# Altium PCB PCB1.PcbDoc
Units mil, origin at the board's own origin, x right, y up, seen from the top; angles counter-clockwise.
Board outline 3937.01 x 3937.01 mil, 2 copper layers (Top Layer, Bottom Layer); 162 components, 129 nets, 526 pads, 102 vias.
Unrouted connection lines stored in the file: 246.
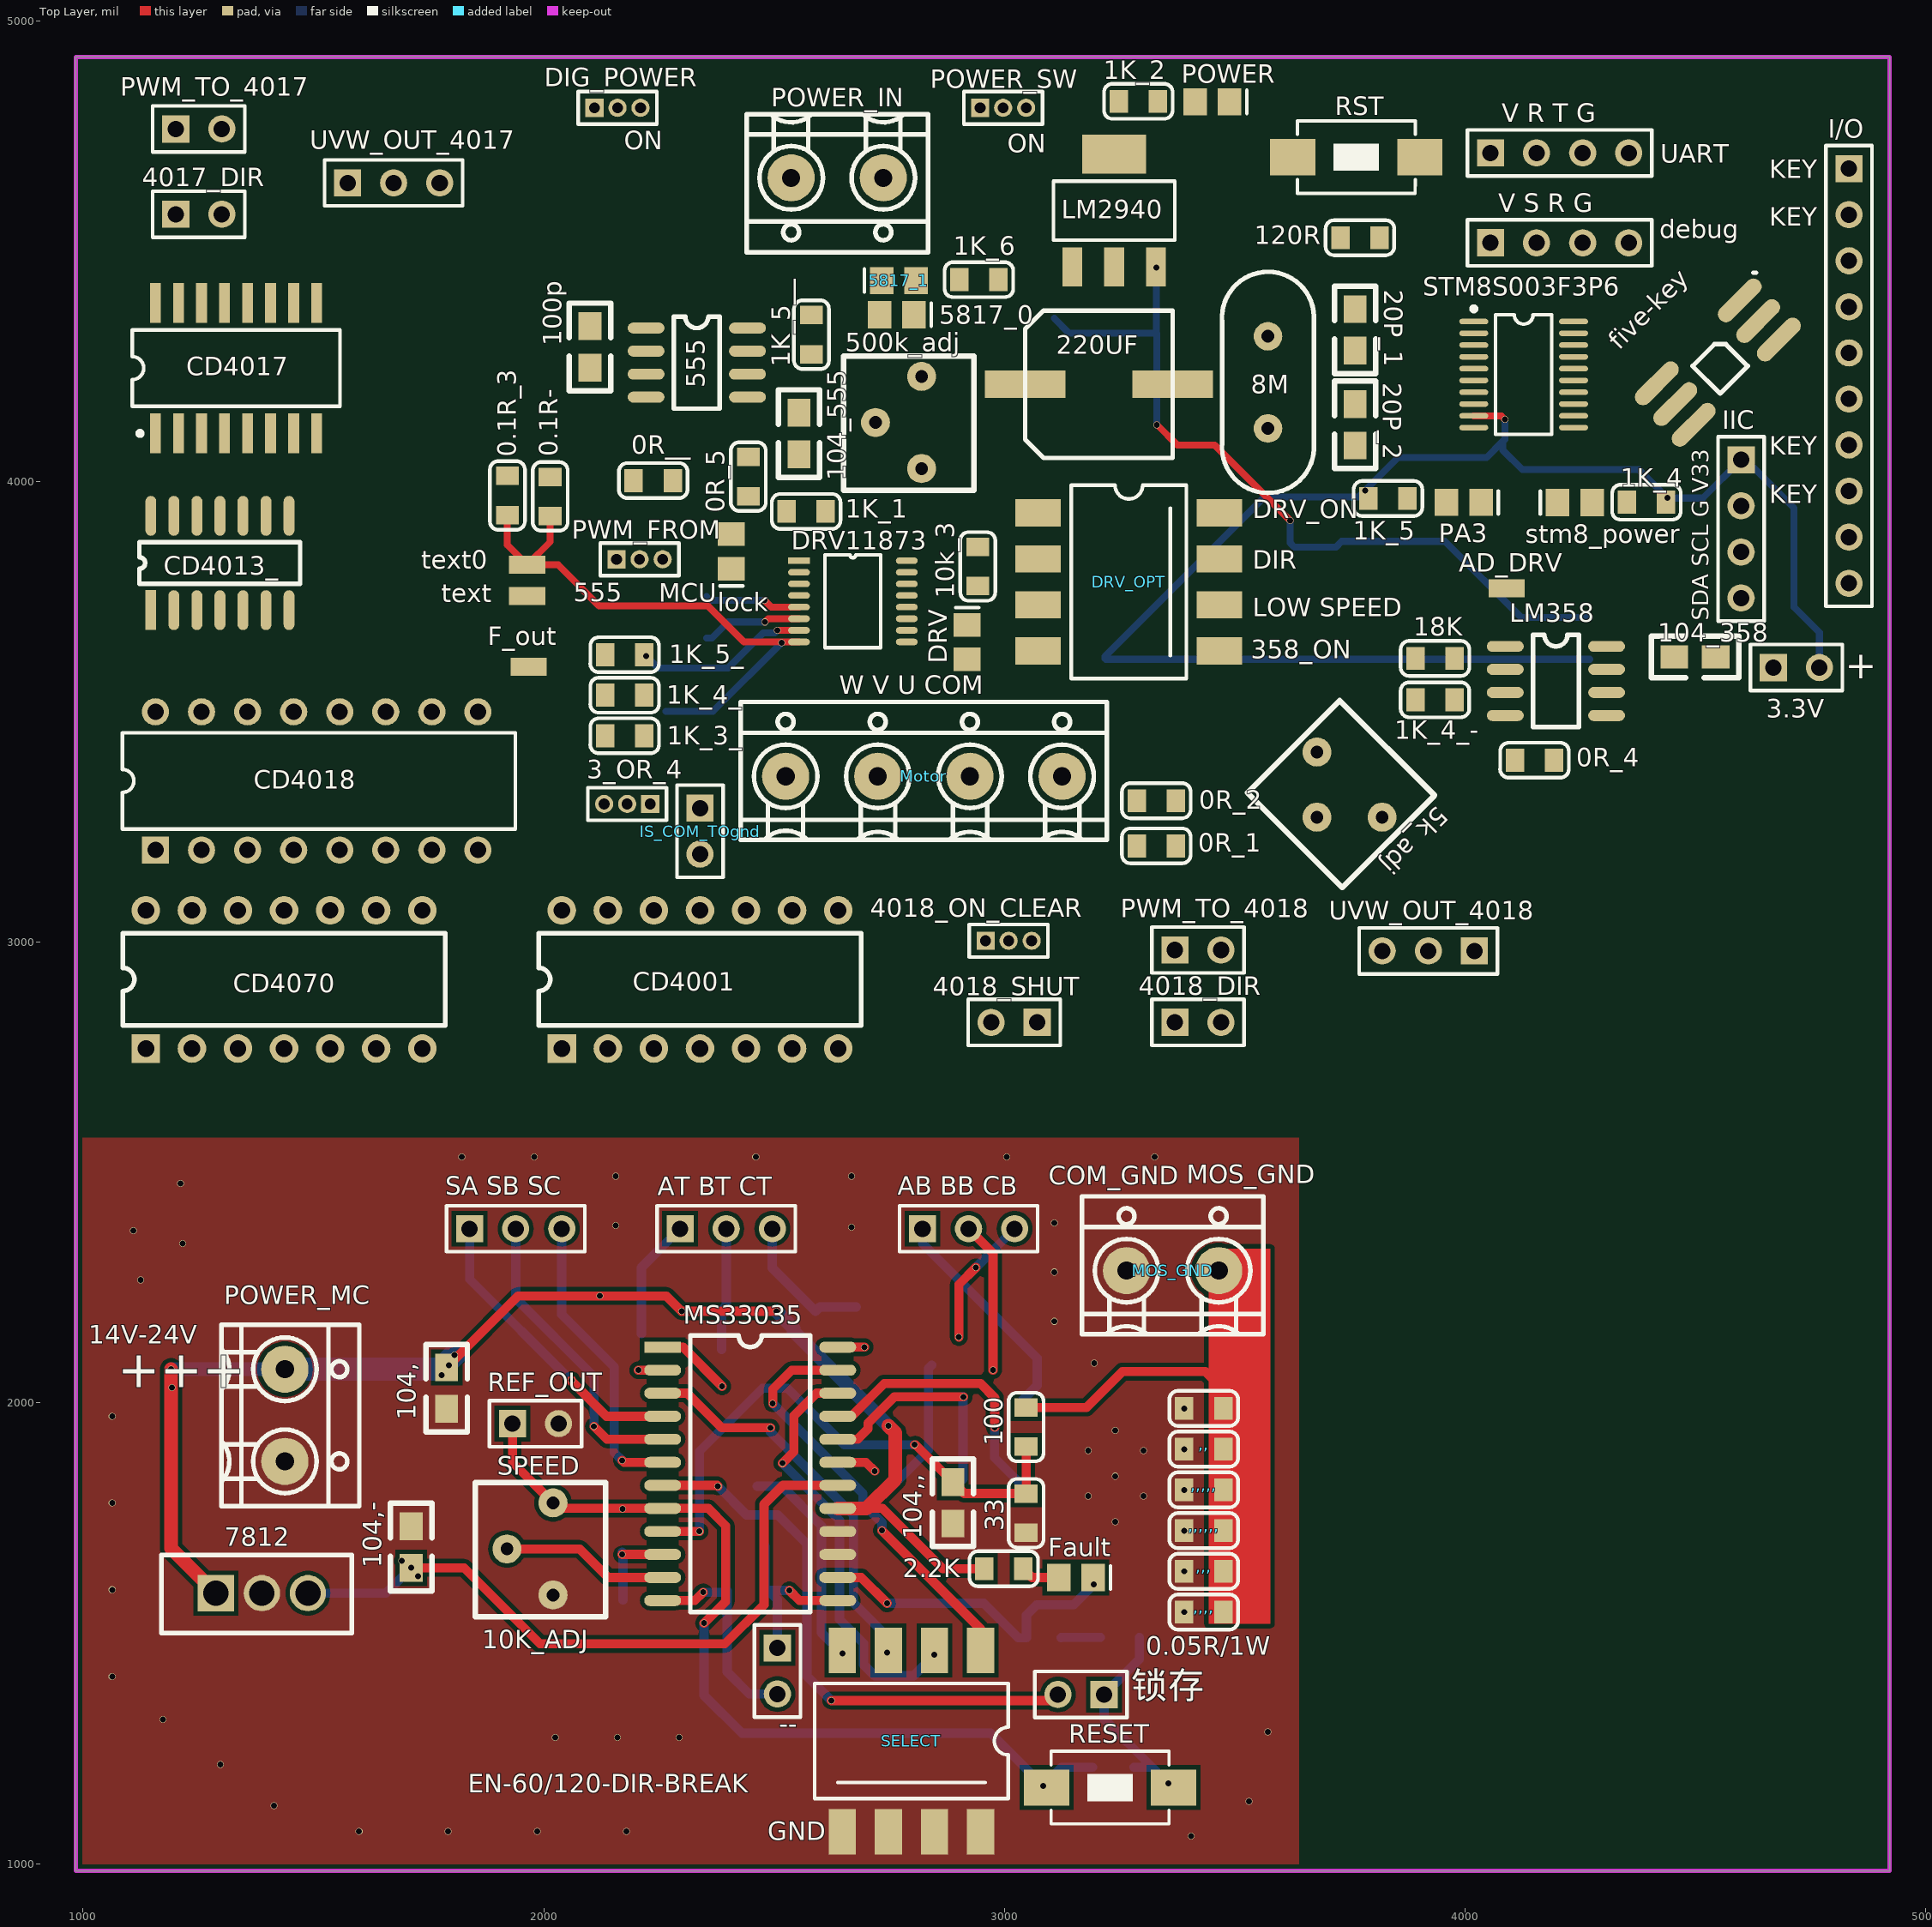
[diagram p0: Top Layer view]
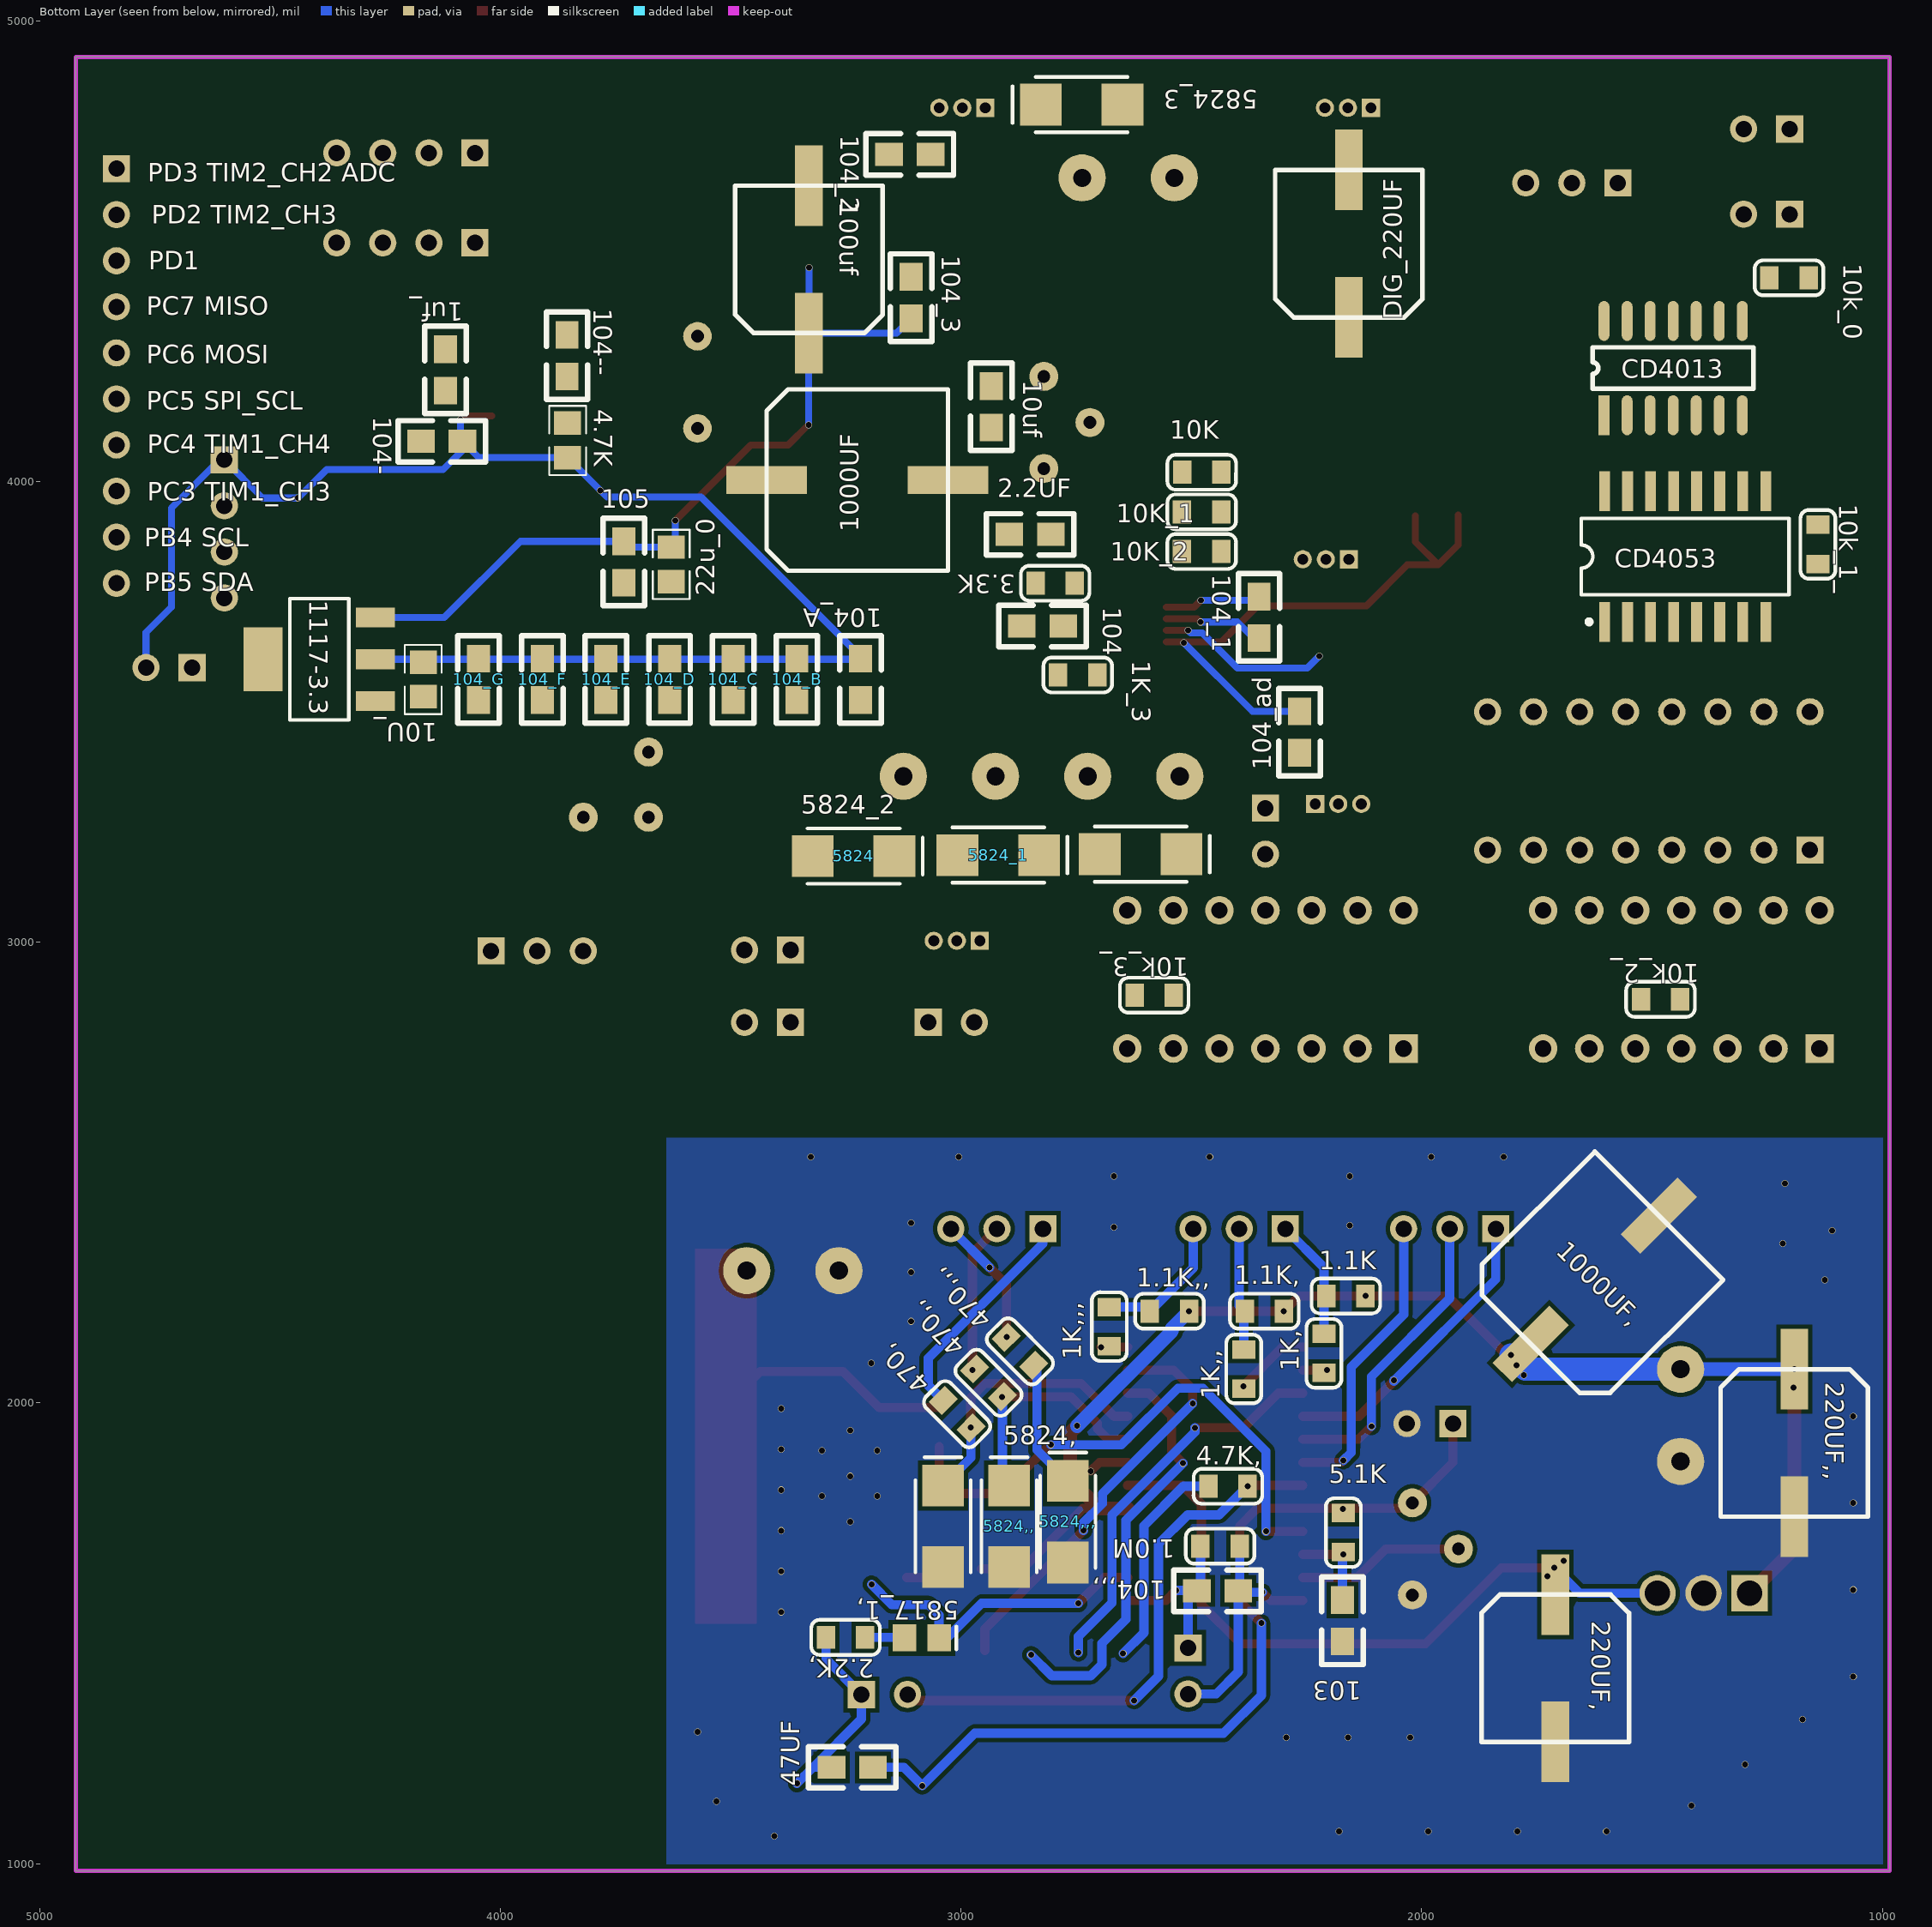
[diagram p1: Bottom Layer view, seen from below]

## Layer stack, top to bottom
Top Layer: signal copper 1.4
Dielectric: dielectric 12.6, FR-4, Dk 4.8
Bottom Layer: signal copper 1.4

## Board outline
984.25,984.25 4921.26,984.25 4921.26,4921.26 984.25,4921.26

## Design rules (kind name [scope] priority, off if disabled: settings)
Clearance [All] p1: gap=9
ComponentClearance [All] p1 off: gap=10 collisioncheckmode=3 verticalgap=10 showdistances=FALSE
PlaneConnect [All] p1: planeconnectstyle=Direct reliefexpansion=20 reliefentries=4 reliefconductorwidth=10 reliefairgap=10
PolygonConnect [All] p1: connectstyle=Direct reliefconductorwidth=10 reliefentries=4 polygonreliefangle="90 Angle"
RoutingVias [All] p1: holewidth=13 width=15 viastyle="Through Hole" minholewidth=13 minwidth=15 maxholewidth=13 maxwidth=15
SilkscreenOverComponentPads [All] p1: minsilkscreentomaskgap=10
SolderMaskExpansion [All] p1: expansion=4
Width Width_1 [All] p1: maxlimit=50 minlimit=8 preferedwidth=13
25 further rules are at their usual default settings.

## Components (designator, comment, footprint, x,y, rotation, side; value= is the part's Value field where it differs from the comment)
0.1R- "Res2" "RES 0805_1" 2014,4010 r270 top
0.1R_3 "Res2" "RES 0805_1" 1921,4012 r270 top
0.05R/1W "Res2" "RES 0805_1" 3475,1988 r180 top
0R_1 "Res2" "RES 0805_1" 3372,3209 r180 top
0R_2 "Res2" "RES 0805_1" 3372,3307 r180 top
0R_4 "Res2" "RES 0805_1" 4108,3395 r0 top
0R_5 "Res2" "RES 0805_1" 2444,4053 r270 top
0R__ "Res2" "RES 0805_1" 2195,4002 r0 top
1.0M "Res2" "RES 0805_1" 2395,1689 r0 bottom
1.1K "Res2" "RES 0805_1" 2122,2232 r0 bottom
1.1K, "Res2" "RES 0805_1" 2299,2199 r0 bottom
1.1K,, "Res2" "RES 0805_1" 2505,2199 r0 bottom
1K, "Res2" "RES 0805_1" 2212,2150 r270 bottom
1K,, "Res2" "RES 0805_1" 2386,2116 r270 bottom
1K,,, "Res2" "RES 0805_1" 2678,2208 r270 bottom
1K_1 "Res2" "RES 0805_1" 2527,3935 r0 top
1K_2 "Res2" "RES 0805_1" 3333,4825 r180 top
1K_3 "Res2" "RES 0805_1" 2789,3580 r180 bottom
1K_3_ "Res2" "RES 0805_1" 2133,3448 r0 top
1K_4 "Res2" "RES 0805_1" 4351,3955 r0 top
1K_4_ "Res2" "RES 0805_1" 2133,3536 r0 top
1K_4_- "Res2" "RES 0805_1" 3976.9,3526 r180 top
1K_5 "Res2" "RES 0805_1" 3875,3963 r180 top
1K_5_ "Res2" "RES 0805_1" 2133,3624 r0 top
1K_5__ "Res2" "RES 0805_1" 2581,4276 r90 top
1K_6 "Res2" "RES 0805_1" 2902,4438 r0 top
1uf_ "1UF" 0805 4119,4197 r90 bottom
2.2K "Res2" "RES 0805_1" 2956,1640 r0 top
2.2K, "Res2" "RES 0805_1" 3208,1491 r0 bottom
2.2UF "Cap" 0805_C 2805,3885 r0 bottom
3.3K "Res2" "RES 0805_1" 2753,3779 r0 bottom
3.3V "PIN 2" HDR1X2 4669,3596 r0 top
3_OR_4 "MHDR1X3" MHDR1X3 2231,3300 r180 top
4.7K "4.7K" 0805-1 3854,4089 r270 bottom
4.7K, "Res2" "RES 0805_1" 2463,1819 r180 bottom
5.1K "Res2" "RES 0805_1" 2170,1676 r90 bottom
5k_adj "Header 3" pot（正方形） 3761,3436 r225 top
8M "8M" XTAL2 3572,4115 r270 top
10K "Res2" "RES 0805_1" 2519.9,4020 r180 bottom
10k_0 "Res2" "RES 0805_1" 1245,4442 r180 bottom
10K_1 "Res2" "RES 0805_1" 2435,3934 r0 bottom
10k_1_ "Res2" "RES 0805_1" 1140,3821 r90 bottom
10K_2 "Res2" "RES 0805_1" 2435,3848 r0 bottom
10k_2_ "Res2" "RES 0805_1" 1524,2876 r180 bottom
10k_3 "Res2" "RES 0805_1" 2942,3858 r270 top
10k_3_ "Res2" "RES 0805_1" 2623,2885 r180 bottom
10U_ "Cap Pol1" 0805-1 4167,3570 r270 bottom
10uf "Cap" 0805_C 2934,4117 r90 bottom
18K "Res2" "RES 0805_1" 3892,3616 r0 top
20P_1 "20P" 0805 3761,4374 r270 top
20P_2 "20P" 0805 3761,4078 r90 top
22u_0 "Cap Pol1" 0805-1 3629,3820 r270 bottom
33 "Res2" "RES 0805_1" 3047,1718.11 r90 top
47UF "Cap" 0805_C 3191,1209 r0 bottom
100 "Res2" "RES 0805_1" 3047,1990 r270 top
100p "Cap" 0805_C 2100,4337 r270 top
100uf "Cap Pol1" capso_8*10 3330,4482 r270 bottom
103 "Cap" 0805_C 2172,1572 r270 bottom
104 "Cap" 0805_C 2868,3686 r180 bottom
104, "Cap" 0805_C 1789,1987 r90 top
104,, "Cap" 0805_C 2888,1828 r270 top
104,,, "Cap" 0805_C 2488,1592 r180 bottom
104,- "Cap" 0805_C 1712,1732 r270 top
104- "104" 0805 4082,4087 r0 bottom
104-- "104" 0805 3855,4318 r270 bottom
104_1 "Cap" 0805_C 2353,3660 r90 bottom
104_2 "Cap" 0805 3156,4710 r180 bottom
104_3 "Cap" 0805 3108,4444 r270 bottom
104_358 "Cap" 0805_C 4544,3619 r180 top
104_555 "Cap" 0805_C 2554,4059 r90 top
104_A "104" 0805 3218,3615.53 r270 bottom
104_ad "Cap" 0805_C 2265,3411 r90 bottom
104_B "104" 0805 3356.17,3615.53 r270 bottom
104_C "104" 0805 3494.33,3615.53 r270 bottom
104_D "104" 0805 3632.5,3615.53 r270 bottom
104_E "104" 0805 3770.67,3615.53 r270 bottom
104_F "104" 0805 3908.83,3615.53 r270 bottom
104_G "104" 0805 4047,3615.53 r270 bottom
105 "105" 0805 3732,3870 r270 bottom
120R "Res2" "RES 0805_1" 3814,4529 r180 top
220UF "Cap Pol1" capso_8*10 3205,4211 r180 top
220UF, "Cap Pol1" capso_8*10 1710,1424 r90 bottom
220UF,, "Cap Pol1" capso_8*10 1191,1913 r90 bottom
470, "Res2" "RES 0805_1" 3038.41,2005.48 r225 bottom
470,, "Res2" "RES 0805_1" 2970.17,2073.71 r225 bottom
470,,, "Res2" "RES 0805_1" 2901.93,2141.95 r225 bottom
500k_adj "Header 3" pot（正方形） 2895,4186 r180 top
555 "Header 4X2A" SOP8 2337,4258 r0 top
1000UF "Cap Pol1" CAPSO_10*10 3225,4003 r0 bottom
1000UF, "Cap Pol1" CAPSO_10*10 1624,2267 r315 bottom
1117-3.3 "LM1117" SOT223 4390,3634 r90 bottom
4017_DIR "Header 2" HDR1X2 1201,4580 r0 top
4018_DIR "Header 2" HDR1X2 3370,2826 r0 top
4018_ON_CLEAR "MHDR1X3" MHDR1X3 2959,3003 r0 top
4018_SHUT "Header 2" HDR1X2 3071,2826 r180 top
5817_0 "1N5819" LED_0805 2766,4362 r0 top
5817_1 "1N5819" LED_0805 2771,4436 r180 top
5817_1, "1N5819" LED_0805 3085,1490 r180 bottom
5824 "1N5819" DIODE-SMA 3233,3187 r180 bottom
5824, "1N5819" DIODE-SMA 3039,1732 r90 bottom
5824,, "1N5819" DIODE-SMA 2895.5,1732 r90 bottom
5824,,, "1N5819" DIODE-SMA 2768,1742 r90 bottom
5824_1 "1N5819" DIODE-SMA 2919,3189 r180 bottom
5824_2 "1N5819" DIODE-SMA 2610,3191 r180 bottom
5824_3 "1N5819" DIODE-SMA 2738,4818 r0 bottom
7812 "L78XXCV" TO-220B 1288,1587 r0 top
,, "Res2" "RES 0805_1" 3475,1899.6 r180 top
,,, "Res2" "RES 0805_1" 3475,1634.4 r180 top
,,,, "Res2" "RES 0805_1" 3475,1546 r180 top
,,,,, "Res2" "RES 0805_1" 3475,1811.2 r180 top
,,,,,, "Res2" "RES 0805_1" 3475,1722.8 r180 top
-- "Header 2" HDR1X2 2507,1468 r270 top
"AB BB CB" "Header 3" HDR1X3 2822,2378 r0 top
AD_DRV "1PIN" P 4090,3768 r180 top
"AT BT CT" "Header 3" HDR1X3 2296,2378 r0 top
CD4001 "Header 7X2A" DIP14 2039,2769 r90 top
CD4013 "Header 7X2A" SOP-14P 1454,4246 r90 bottom
CD4013_ "Header 7X2A" SOP-14P 1297,3823 r90 top
CD4017 "Header 8X2A" sop16(2003) 1332,4246 r0 top
CD4018 "Header 8X2A" DIP16 1507,3350 r0 top
CD4053 "Header 8X2A" sop16(2003) 1428,3837 r180 bottom
CD4070 "Header 7X2A" DIP14 1136.17,2769 r90 top
debug "Header 4" HDR1X4 4055,4518 r0 top
DIG_220UF "Cap Pol1" capso_8*10 2158,4516 r270 bottom
DIG_POWER "MHDR1X3" MHDR1X3 2110,4811 r0 top
DRV "LED" LED_0805 2919,3651 r90 top
DRV11873 "Header 8X2A" TSSOP16 2554,3828 r0 top
DRV_OPT "SW DIP-4" SW8_4BIT 3270,3782 r270 top
F_out "1PIN" P 1967,3598 r180 top
Fault "LED" LED_0805 3155,1621 r0 top
five-key "five_key" 五向按键 4416,4213 r0 top
I/O "Header 10" HDR1X10 4833,4679 r270 top
IIC "Header 4" HDR1X4 4599,4047 r270 top
IS_COM_TOgnd "Header 2" HDR1X2 2339,3291 r270 top
LM358 "10358" SOP8 4202,3567 r0 top
LM2940 "LM2940_2" SOT223 3258,4585 r0 top
lock "LED" LED_0805 2407,3848 r270 top
MOS_GND "Header 2" ED120/2DS_1 3465,2287 r180 top
Motor "Header 4" ED120/4DS_1 3125,3360 r180 top
MS33035 "Header 12X2A" SO-24W 2259,2121 r0 top
PA3 "LED" LED_0805 3997,3954.53 r0 top
POWER "LED" LED_0805 3451,4824 r0 top
POWER_IN "Header 2" ED120/2DS_1 2537,4659 r0 top
POWER_MC "Header 2" ED120/2DS_1 1438,1873 r90 top
POWER_SW "MHDR1X3" MHDR1X3 2947,4811 r0 top
PWM_FROM "MHDR1X3" MHDR1X3 2158,3831 r0 top
PWM_TO_4017 "Header 2" HDR1X2 1201,4765 r0 top
PWM_TO_4018 "Header 2" HDR1X2 3370,2983 r0 top
REF_OUT "Header 2" HDR1X2 1932,1955 r0 top
RESET "SW-PB" SW_PB2_A1 3227,1165 r270 top
RST "SW-PB" SW_PB2_A1 3766,4704 r90 top
"SA SB SC" "Header 3" HDR1X3 1839,2378 r0 top
SELECT "SW DIP-4" SW8_4BIT 2798,1266 r180 top
SPEED "MHDR1X3" pot（正方形） 2095,1741 r180 top
stm8_power "LED" LED_0805 4238,3954 r180 top
STM8S003F3P6 "STM8S003F3P6" TSSOP20 4127,4232 r270 top
text "1PIN" P 1964,3751 r180 top
text0 "1PIN" P 1964,3819 r180 top
UART "PIN 4" HDR1X4 4055,4713 r0 top
UVW_OUT_4017 "Header 3" HDR1X3 1574,4648 r0 top
UVW_OUT_4018 "Header 3" HDR1X3 4020,2981 r180 top
锁存 "Header 2" HDR1X2 3216,1367 r180 top

## Footprints (in the part's own frame and the unit in brackets; to place one, negate y for a bottom-side part, rotate by r counter-clockwise, add the part's x,y. Pads: shape width x height; smd on the part's side, far side on the other; paste and mask are expansions set on the pad)
0805 [mil]
  rect 60x50 smd: 1(0,0) 2(90,0)
  silkscreen extent -50,-45 140,45
0805-1 [mm] "ÌùÆ"
  rect 1.3x1.5 smd: 1(-0.95,0) 2(0.95,0)
  silkscreen extent -1.91,-1.02 1.9,1.02, body extent -1.14,-0.51 1.14,0.51, height 1
0805_C [mil]
  rect 60x50 smd: 1(0,0) 2(90,0)
  silkscreen extent -50,-45 140,45, body extent 6,-25 84,25, height 31
capso_8*10 [mil]
  rect 175x60 smd: 1(160,0) 2(-160,0)
  silkscreen extent -160,-160 160,160, body extent -192,-162 198,164, height 402
CAPSO_10*10 [mil]
  rect 175x60 smd: 1(196.85,0) 2(-196.85,0)
  silkscreen extent -197,-197 197,197, body extent -227,-206 229,200, height 402
DIODE-SMA [mm] "贴?"
  rect 2.3x2.3 smd: 1(-2.25,0) 2(2.25,0)
  silkscreen extent -2.54,-1.52 3.81,1.52, body extent -2.92,-1.4 2.92,1.4, height 3
DIP14 [mil]
  rect 62x62 hole 36: 1(0,0)
  round 62 hole 36: 2(0,-100) 3(0,-200) 4(0,-300) 5(0,-400) 6(0,-500) 7(0,-600) 8(300,-600) 9(300,-500) 10(300,-400) 11(300,-300) 12(300,-200) 13(300,-100) 14(300,0)
  silkscreen extent 50,-650 250,50
DIP16 [mm]
  rect 1.5x1.5 hole 0.9: 1(-8.89,-3.81)
  round 1.5 hole 0.9: 2(-6.35,-3.81) 3(-3.81,-3.81) 4(-1.27,-3.81) 5(1.27,-3.81) 6(3.81,-3.81) 7(6.35,-3.81) 8(8.89,-3.81) 9(8.89,3.81) 10(6.35,3.81) 11(3.81,3.81) 12(1.27,3.81) 13(-1.27,3.81) 14(-3.81,3.81) 15(-6.35,3.81) 16(-8.89,3.81)
  silkscreen extent -10.72,-2.65 10.95,2.65
ED120/2DS_1 [mm]
  round 2.6 hole 1: 1(0,0) 2(5.08,0)
  silkscreen extent -2.46,-4.1 7.54,3.5
ED120/4DS_1 [mm]
  round 2.6 hole 1: 1(0,0) 2(5.08,0) 3(10.16,0) 4(15.24,0)
  silkscreen extent -2.46,-4.1 17.72,3.5
HDR1X2 [mm] "Connector; Header; 2 Position"
  rect 1.5x1.5 hole 0.9: 1(0,0)
  round 1.5 hole 0.9: 2(2.54,0)
  silkscreen extent -1.27,-1.27 3.81,1.27
HDR1X3 [mm] "Connector; Header; 3 Position"
  rect 1.5x1.5 hole 0.9: 1(0,0)
  round 1.5 hole 0.9: 2(2.54,0) 3(5.08,0)
  silkscreen extent -1.27,-1.27 6.35,1.27
HDR1X4 [mm] "Connector; Header; 4 Position"
  rect 1.5x1.5 hole 0.9: 1(0,0)
  round 1.5 hole 0.9: 2(2.54,0) 3(5.08,0) 4(7.62,0)
  silkscreen extent -1.27,-1.27 8.89,1.27
HDR1X10 [mm] "Connector; Header; 10 Position"
  rect 1.5x1.5 hole 0.9: 1(0,0)
  round 1.5 hole 0.9: 2(2.54,0) 3(5.08,0) 4(7.62,0) 5(10.16,0) 6(12.7,0) 7(15.24,0) 8(17.78,0) 9(20.32,0) 10(22.86,0)
  silkscreen extent -1.27,-1.27 24.13,1.27
LED_0805 [mm] "贴?"
  rect 1.3x1.5 smd: 1(-0.95,0) 2(0.95,0)
  silkscreen extent 1.91,-0.64 1.91,0.64
MHDR1X3 [mm] "Connector; Header; 3 Position"
  rect 1x1 hole 0.6: 1(0,0)
  round 1 hole 0.6: 2(1.27,0) 3(2.54,0)
  silkscreen extent -0.9,-0.9 3.44,0.9
P [mm]
  rect 2x1 smd: 1(0,0)
pot（正方形） [mm]
  round 1.6 hole 0.7: 1(1.905,-1.067) 2(4.445,1.473) 3(1.905,4.013)
  silkscreen extent -0.99,-2.18 6.2,5.21
"RES 0805_1" [mil]
  rect 40x50 smd: 1(0,0) 2(85,0)
  silkscreen extent -32,-38 117,38, body extent 3,-25 82,25, height 30
SO-24W [mil]
  rect 80x24 smd: 1(-1,0)
  oval 80x24 smd: 2(-1,-50) 3(-1,-100) 4(-1,-150) 5(-1,-200) 6(-1,-250) 7(-1,-300) 8(-1,-350) 9(-1,-400) 10(-1,-450) 11(-1,-500) 12(-1,-550) 13(379,-550) 14(379,-500) 15(379,-450) 16(379,-400) 17(379,-350) 18(379,-300) 19(379,-250) 20(379,-200) 21(379,-150) 22(379,-100) 23(379,-50) 24(379,0)
  silkscreen extent 59,-575 319,25
SOP8 [mil]
  oval 80x24 smd: 1(-115,75) 2(-115,25) 3(-115,-25) 4(-115,-75) 5(105,-75) 6(105,-25) 7(105,25) 8(105,75)
  silkscreen extent -55,-100 45,100, body extent -126,-95 110,97, height 67
sop16(2003) [mm] "Small Outline; 16 Leads; Body Width 5.6 mm; Pitch"
  rect 0.6x2.2 smd: 1(-4.445,-3.6) 2(-3.175,-3.6) 3(-1.905,-3.6) 4(-0.635,-3.6) 5(0.635,-3.6) 6(1.905,-3.6) 7(3.175,-3.6) 8(4.445,-3.6) 9(4.445,3.6) 10(3.175,3.6) 11(1.905,3.6) 12(0.635,3.6) 13(-0.635,3.6) 14(-1.905,3.6) 15(-3.175,3.6) 16(-4.445,3.6)
  silkscreen extent -5.73,-3.72 5.73,2.1
SOP-14P [mm]
  rect 2.2x0.6 smd: 1(-2.6,3.81)
  oval 2.2x0.6 smd: 2(-2.6,2.54) 3(-2.6,1.27) 4(-2.6,0) 5(-2.6,-1.27) 6(-2.6,-2.54) 7(-2.6,-3.81) 8(2.6,-3.81) 9(2.6,-2.54) 10(2.6,-1.27) 11(2.6,0) 12(2.6,1.27) 13(2.6,2.54) 14(2.6,3.81)
  silkscreen extent -1.14,-4.42 1.14,4.44
SOT223 [mm]
  rect 1.1x2.15 smd: 1(-2.808,-3.025) 2(-0.508,-3.025) 3(1.792,-3.025)
  rect 3.5x2.15 smd: 4(-0.508,3.175)
  silkscreen extent -3.86,-1.55 2.84,1.7, body extent -3.78,-3.2 2.72,3.8, height 1.65
SW8_4BIT [mm]
  rect 1.5x2.5 smd: 1(-3.81,-5) 2(-1.27,-5) 3(1.27,-5) 4(3.81,-5) 5(3.81,5) 6(1.27,5) 7(-1.27,5) 8(-3.81,5)
  silkscreen extent -5.33,-3.18 5.33,3.18, body extent -5.21,-3.43 5.08,3.43, height 2.15
SW_PB2_A1 [mm]
  rect 2x2.5 smd: 1(0,3.556) 2(0,-3.444)
  silkscreen extent -2,-3.19 2,3.31, body extent -2.03,-3.17 2.03,3.3, height 1.2
TO-220B [mm]
  rect 2x2 hole 1.4: 1(0,0)
  round 2 hole 1.4: 2(2.54,0) 3(5.08,0)
  silkscreen extent -3,-2.2 7.5,2.1
TSSOP16 [mm]
  rect 1.2x0.36 smd: 1(0,0)
  oval 1.2x0.36 smd: 2(0,-0.64) 3(0,-1.28) 4(0,-1.92) 5(0,-2.56) 6(0,-3.2) 7(0,-3.84) 8(0,-4.48) 9(5.94,-4.48) 10(5.94,-3.84) 11(5.94,-3.2) 12(5.94,-2.56) 13(5.94,-1.92) 14(5.94,-1.28) 15(5.94,-0.64) 16(5.94,0)
  silkscreen extent 1.43,-4.8 4.5,0.32
TSSOP20 [mm] "Shrink Small Outline; 20 Leads; Body Width 4.4 mm; Pitch 0.65 mm"
  oval 0.3x1.6 smd: 1(-2.925,-2.75) 2(-2.275,-2.75) 3(-1.625,-2.75) 4(-0.975,-2.75) 5(-0.325,-2.75) 6(0.325,-2.75) 7(0.975,-2.75) 8(1.625,-2.75) 9(2.275,-2.75) 10(2.925,-2.75) 11(2.925,2.75) 12(2.275,2.75) 13(1.625,2.75) 14(0.975,2.75) 15(0.325,2.75) 16(-0.325,2.75) 17(-0.975,2.75) 18(-1.625,2.75) 19(-2.275,2.75) 20(-2.925,2.75)
  silkscreen extent -3.75,-2.87 3.3,1.55, body extent -3.3,-1.91 3.3,1.91, height 1.1
XTAL2 [mil]
  round 62 hole 28: 1(0,0) 2(-200,0)
  silkscreen extent -340,-100 140,100
五向按键 [mil]
  oval 35.43x120 smd rot 135: 1(0,0) 2(40,-45) 3(80,-90) 4(180,180) 5(220,135) 6(265,95)
  silkscreen extent 78,-22 215,240

## Part data
0.1R- 0.1R_3 0.05R/1W 0R_1 0R_2 0R_4 0R_5 0R__ 1.0M 1.1K 1.1K, 1.1K,, 1K, 1K,, 1K,,, 1K_1 1K_2 1K_3 1K_3_ 1K_4 1K_4_ 1K_4_- 1K_5 1K_5_ 1K_5__ 1K_6 2.2K 2.2K, 3.3K 4.7K, 5.1K 10K 10k_0 10K_1 10k_1_ 10K_2 10k_2_ 10k_3 10k_3_ 18K 33 100 120R 470, 470,, 470,,, ,, ,,, ,,,, ,,,,, ,,,,,,: "Resi"
1uf_ 20P_1 20P_2 104- 104--: library part "CAP 2"
2.2UF 10uf 47UF 100p 103 104 104, 104,, 104,,, 104,- 104_1 104_358 104_555 104_ad: "Capac"
3_OR_4 4018_ON_CLEAR "AB BB CB" "AT BT CT" DIG_POWER POWER_SW PWM_FROM "SA SB SC" UVW_OUT_4017 UVW_OUT_4018: "Header, 3-Pin"
4.7K: library part R
5k_adj 500k_adj SPEED: "Header"
8M: library part XTAL
10U_ 22u_0 100uf 220UF 220UF, 220UF,, 1000UF 1000UF, DIG_220UF: "Polarized Capacitor (Radial)"
104_2 104_3: "Capacitor"
104_A 104_B 104_C 104_D 104_E 104_F 104_G 105: library part Cap, "Capacitor"
555: "Header, 4-Pin, Dual row"
1117-3.3: library part Component_1
4017_DIR 4018_DIR 4018_SHUT -- IS_COM_TOgnd PWM_TO_4017 PWM_TO_4018 REF_OUT 锁存: "Header, 2-Pin"
5817_0 5817_1 5817_1, 5824 5824, 5824,, 5824,,, 5824_1 5824_2 5824_3: library part "Diode 1N4001", "1 Amp General Purpose Rectifier"
7812: "ST POSITIVE VOLTAGE REGULAT"
CD4001 CD4070: "Header, 7-Pin, Dual row"
CD4013 CD4013_: "Header, 7-Pin, Dual r"
CD4017 CD4018 CD4053 DRV11873: "Header, 8-Pin, Dual row"
debug IIC: "Header, 4-Pin"
DRV lock PA3 POWER stm8_power: library part L
DRV_OPT SELECT: "±àÂë¿"
five-key: library part five_
I/O: "Header, 10-Pin"
LM358: library part 103
LM2940: library part LM29
MOS_GND POWER_IN POWER_MC: "Header, 2-"
Motor: "Header, 4-"
MS33035: "Header, 12-Pin, Dual row"
RESET RST: "Î¢¶¯¿"

## Via types
v1: diameter 15, hole 13, Top Layer to Bottom Layer, 102 vias

## Nets (pads, with @x,y where several pads share a name; then routed paths per layer and width w, separated by ;. In a path a pad name is that pad's centre, name@x,y a point inside that pad or via, vN(x,y) a via of type N, cw(c..) or ccw(c..) an arc to the next point about the centre after c; other vN are vias at no path point)
00: CD4013.6 CD4017.3
11: CD4013_.4 CD4017.2
22: CD4013.8 CD4017.4
33: CD4013.4 CD4017.7
44: CD4013_.6 CD4017.10
55: CD4013.10 CD4017.1
60/120: MS33035.22 SELECT.2 | length 921.1
  Top Layer w20: v1(2518,1869) 2543,1894 2543,1972 2592,2021 MS33035.22
  Bottom Layer w20: v1(2518,1869) 2642,1745 2642,1530 2694,1478 2694,1432 2718,1408 2803,1408 v1(2848,1453)
66: CD4017.5 CD4017.15
77: CD4017.6
88: CD4017.9
99: CD4017.11
358_VCC: 104_358.2 DRV_OPT.5 LM358.8
555_OUT: 555.3 PWM_FROM.1 PWM_TO_4017.2 PWM_TO_4018.2
+3V3: 1K_4.2 1K_5.2 3.3V.2 4.7K.2 10U_.1 104-.1 104_A.1 104_B.1 104_C.1 104_D.1 104_E.1 104_F.1 104_G.1 1117-3.3.2 debug.1 IIC.1 STM8S003F3P6.9 UART.1 | length 3374
  Top Layer w15: STM8S003F3P6.9 4078.57,4142.43 v1(4086,4135)
  Bottom Layer w15: 104_A.1 3218,3620 3564,3966 3768.4,3966 4.7K.2 4046.6,4051.6 104-.1 ; 104_A.1@3219.53,3614 1117-3.3.2 ; v1(4086,4135) 4086,4091 104-.1 ; 3.3V.2 4769,3672 4714,3727 4714,3942 4609,4047 IIC.1 4516,3964 v1(4439,3964) 4377,4026 4124,4026 4082,4068 104-.1
  other v1: 3783,3980.6
A: 10k_1_.1 4017_DIR.1 CD4053.9 CD4053.10 CD4053.11
AB: 470,.1 "AB BB CB.1" | length 489.2
  Bottom Layer w20: 2822,2378 2822,2346 3071,2097 3071,2038.07 3038.41,2005.48
AD-DRV: 5k_adj.2 5k_adj.3 AD_DRV.1 LM358.1
AT: 1.1K.2 1K,.1 "AT BT CT.1" | length 262.8
  Bottom Layer w20: 2212,2150 2212,2294 2296,2378
BB: 470,,.1 "AB BB CB.2" | length 329
  Top Layer w20: 2922,2378 2975,2325 v1(2975,2071)
BREAK: MS33035.23 SELECT.1 | length 911.9
  Top Layer w20: v1(2497,1999) 2497,2030 2538,2071 MS33035.23 ; v1(2734,1723) 2948,1509 SELECT.1
  Bottom Layer w20: v1(2497,1999) 2692.51,1803.49 2692.51,1781.49 2734,1740 v1(2734,1723)
BT: 1.1K,.2 1K,,.1 "AT BT CT.2" | length 267.8
  Bottom Layer w20: 2386,2116 2386,2197 2384,2199 2396,2211 2396,2378
CB: 470,,,.1 "AB BB CB.3" | length 285.1
  Top Layer w20: v1(2901,2143) 2901,2257 v1(2938,2294)
  Bottom Layer w20: v1(2938,2294) 3022,2378
CLOCK: CD4017.14 PWM_TO_4017.1
COM: 3_OR_4.2 DRV11873.13 Motor.1
COM_TO: 1K_3_.1 1K_4_.1 1K_5_.1 3_OR_4.3
CP: CD4018.14 PWM_TO_4018.1
CPN: 104_1.1 DRV11873.6 | length 218.4
  Top Layer w15: v1(2480,3695) 2487.02,3702.02 DRV11873.6
  Bottom Layer w15: 104_1.1 2365,3660 2400,3695 v1(2480,3695)
CPP: 104_1.2 DRV11873.5 | length 210.4
  Top Layer w15: v1(2479,3742) 2493.79,3727.21 DRV11873.5
  Bottom Layer w15: 104_1.2 2361,3742 v1(2479,3742)
CS: 3.3K.2 DRV11873.14
CT: 1.1K,,.2 1K,,,.1 "AT BT CT.3" | length 309.7
  Bottom Layer w20: 2496,2378 2496,2293 2590,2199 2599,2208 2678,2208
"CUR SEN": 33.2 100.2 104,,.1 MS33035.9 | length 1216.5
  Top Layer w20: MS33035.9 v1(2338,1721) ; v1(2805,1909) 2807,1909 2888,1828 2912.89,1803.11 33.2 100.2
  Bottom Layer w20: v1(2338,1721) 2338,1895 2475,2032 2529,2032 2652,1909 v1(2805,1909)
DIG_VCC: 10k_0.2 10k_1_.2 10k_2_.2 10k_3_.1 4018_ON_CLEAR.3 CD4001.14 CD4013.5 CD4013.9 CD4013.14 CD4013_.5 CD4013_.14 CD4017.16 CD4018.16 CD4053.16 CD4070.14 DIG_220UF.2 DIG_POWER.2
DIR: MS33035.3 SELECT.3 | length 857.9
  Top Layer w20: MS33035.3 2311,2021 2386,1946 v1(2492,1946)
  Bottom Layer w20: v1(2492,1946) 2492,1937 2672,1757 2672,1566 2745,1493 v1(2745,1458)
EN: 4.7K,.2 MS33035.7 锁存.2 | length 1224.9
  Top Layer w20: MS33035.7 2376,1821 v1(2378,1819) ; v1(2624,1354) 3103,1354 锁存.2
  Bottom Layer w20: v1(2378,1819) 2440,1757 2508,1757 2571,1694 2571,1407 v1(2624,1354)
ENABLE: 4.7K,.1 SELECT.4 | length 471.3
  Bottom Layer w20: 2463,1819 2517,1819 2603,1733 2603,1501 v1(2648,1456)
FAULT_OUT: 5817_1,.2 Fault.2 MS33035.14 | length 687.4
  Top Layer w20: MS33035.14 2689,1621 v1(2745,1565)
  Bottom Layer w20: v1(2745,1565) 2955,1565 3030,1490 3047.6,1490 3047.6,1539.6 3070,1562 3150,1562 v1(3194,1606)
FG: 10K_1.2 DRV11873.2 F_out.1
FR: 10k_3.1 DRV11873.15 DRV_OPT.2
FS: 10K.1 DRV11873.1 DRV_OPT.3
GND: 0.1R-.1 0.1R_3.1 0R_1.1 0R_2.1 0R_4.2 0R__.1 1K_4_-.2 1uf_.2 3.3V.1 10U_.2 20P_1.1 20P_2.1 22u_0.2 100uf.2 104--.1 104-.2 104_2.1 104_3.1 104_358.1 104_A.2 104_ad.1 104_B.2 104_C.2 104_D.2 104_E.2 104_F.2 104_G.2 105.2 1000UF.2 1117-3.3.1 4017_DIR.2 4018_DIR.2 4018_ON_CLEAR.1 4018_SHUT.1 CD4001.7 CD4013.3 CD4013.7 CD4013.11 CD4013_.3 CD4013_.7 CD4017.8 CD4017.13 CD4018.8 CD4018.15 CD4053.6 CD4053.7 CD4053.8 CD4070.7 debug.4 DIG_220UF.1 five-key.5 IIC.2 LM2940.2 POWER.2 POWER_IN.2 RST.1 stm8_power.2 STM8S003F3P6.7 text.1 UART.4
GND_DRV: 0R_5.2 0R__.2 2.2UF.1 3.3K.1 10uf.1 220UF.2 DRV.2 IS_COM_TOgnd.2 lock.2
GND_MC: 0.05R/1W.2 33.1 103.2 104,,.2 104,-.1 104,.1 220UF,,.2 220UF,.2 1000UF,.2 5824,,,.1 5824,,.1 5824,.1 7812.2 ,,,,,,.2 ,,,,,.2 ,,,,.2 ,,,.2 ,,.2 MOS_GND.2 MS33035.15 MS33035.16 POWER_MC.1 REF_OUT.2 SELECT.5 SELECT.6 SELECT.7 SELECT.8 SPEED.3
  other v1: 3405,1060 1599,1070 1792.33,1070 1985.67,1070 2179,1070 1414,1126 3531,1135 1298,1215 2025,1274 2159.5,1274 2294,1274 3572,1286 1173,1313 1063,1406 3390,1546 1063,1594.33 3390,1634.4 3390,1722.8 3240,1742 1063,1782.67 3182,1798 3302,1798 3390,1811.2 3240,1841 3182,1896 3302,1896 3390,1899.6 3240,1940 1063,1971 3390,1988 3195,2086 3108,2177 1125,2267 3108,2284 1216,2346 1109,2374 2668,2381 2156,2385 3108,2391 1211,2476 2156,2492 2668,2492 1822,2534 1979,2534 2460,2534 3005,2534 3326,2534
GROUND_DRV: 0.1R-.2 0.1R_3.2 104_ad.2 DRV11873.8 DRV_OPT.6 DRV_OPT.7 LM358.3 text0.1 | length 1224.6
  Top Layer w15: 0.1R_3.2 1921,3862 text0.1 ; 0.1R-.2 2014,3869 text0.1 ; DRV11873.8 2434.38,3651.62 2356,3730 2120,3730 2031,3819 text0.1
  Bottom Layer w15: 104_ad.2 2367,3501 v1(2516,3650)
KEY1: five-key.2 I/O.8 STM8S003F3P6.13
KEY2: five-key.1 I/O.7 STM8S003F3P6.14
KEY3: five-key.3 I/O.2 STM8S003F3P6.19
KEY4: five-key.4 I/O.1 STM8S003F3P6.20
KEY5: five-key.6 PA3.2 STM8S003F3P6.10
LD: 4018_ON_CLEAR.2 CD4018.1 CD4018.2 CD4018.7 CD4018.10
MCU_PWM: 120R.2 PWM_FROM.3
Net0R_1_2: 0R_1.2 0R_2.2 5824.1 5824_1.1 5824_2.1
Net0R_4_1: 0R_4.1 LM358.4
Net0R_5_1: 0R_5.1 100p.1 104_555.1 555.1
Net1K,,,_2: 1K,,,.2 MS33035.24 | length 58
  Top Layer w20: MS33035.24 v1(2696,2121)
Net1K,,_2: 1K,,.2 MS33035.1 | length 164.2
  Top Layer w20: MS33035.1 2302,2121 v1(2387,2036)
Net1K,_2: 1K,.2 MS33035.2 | length 53
  Top Layer w20: v1(2205,2071) MS33035.2
Net1K_1_1: 1K_1.1 lock.1
Net1K_2_1: 1K_2.1 POWER.1
Net1K_3_1: 1K_3.1 DRV.1
Net1K_4_1: 1K_4.1 stm8_power.1
Net1K_4_-_1: 1K_4_-.1 18K.2 LM358.2
Net1K_5_1: 1K_5.1 PA3.1
Net1K_5___1: 1K_5__.1 555.7 5817_0.1 5817_1.2
Net1K_6_1: 1K_6.1 5817_1.1
Net1K_6_2: 1K_6.2 500k_adj.1
Net1uf__1: 1uf_.1 STM8S003F3P6.8
Net2.2K,_1: 2.2K,.1 5817_1,.1 | length 86
  Bottom Layer w20: 3122.4,1490 3123.4,1491 3208,1491
Net2.2K,_2: 2.2K,.2 47UF.2 RESET.1 锁存.1 | length 446.9
  Bottom Layer w20: 47UF.2 3321,1209 ; 3293,1491 3293,1444 锁存.1 3216,1314 3321,1209 ; v1(3356,1174) 3321,1209
Net2.2K_2: 2.2K.2 Fault.1 | length 84.5
  Top Layer w20: 2.2K.2 3060,1621 Fault.1
Net3_OR_4_1: 3_OR_4.1 IS_COM_TOgnd.1
Net5k_adj_1: 5k_adj.1 18K.1
Net10k_0_1: 10k_0.1 CD4017.12
Net10k_2__1: 10k_2_.1 4018_DIR.1 CD4070.1 CD4070.5
Net10k_3__2: 10k_3_.2 4018_SHUT.2 CD4001.2 CD4001.6 CD4001.12
Net100p_2: 100p.2 500k_adj.2 555.2 555.6
Net104_555_2: 104_555.2 555.5
Net120R_1: 120R.1 STM8S003F3P6.1
Net470,,,_2: 470,,,.2 5824,,,.2 MS33035.19 | length 389.6
  Top Layer w20: MS33035.19 2699,1871 v1(2718,1852)
  Bottom Layer w20: 2752,1820.58 2757.59,1820.58 2835,1897.99 2835,2075.01 2841.83,2081.84
Net470,,_2: 470,,.2 5824,,.2 MS33035.20 | length 517.2
  Top Layer w20: MS33035.20 2681,1921 2704,1944 2704,1956 2761,2013 v1(2911,2013)
  Bottom Layer w20: 2895.5,1820.58 2910.07,1835.15 v1@2910.07,2013.61
Net470,_2: 470,.2 5824,.2 MS33035.21 | length 597.2
  Top Layer w20: MS33035.21 2668,1971 2739,2042 2948,2042 2979,2011 v1(2979,1947)
  Bottom Layer w20: v1@2978.3,1945.37 2978.3,1881.28 3039,1820.58
Net500k_adj_3: 500k_adj.3 5817_0.2
Net5824_3_1: 5824_3.1 POWER_IN.1
Net5824_3_2: 5824_3.2 POWER_SW.3
Net,,,,,,_1: 0.05R/1W.1 100.1 ,,,,,,.1 ,,,,,.1 ,,,,.1 ,,,.1 ,,.1 MOS_GND.1 | length 517.5
  Top Layer w20: 100.1 3178,1990 3256,2068 3436,2068 3475,2029 0.05R/1W.1
Net--_1: 1.0M.2 104,,,.1 --.1 MS33035.13 | length 391.7
  Top Layer w20: v1(2533,1593) 2555,1571 MS33035.13
  Bottom Layer w20: 1.0M.2 2480,1600 2488,1592 ; --.1 2507,1573 2488,1592 ; v1(2533,1593) 2489,1593 2488,1592
Net--_2: 1.0M.1 104,,,.2 --.2 MS33035.12 | length 550.1
  Top Layer w20: MS33035.12 2328,1571 v1(2346,1589)
  Bottom Layer w20: v1(2346,1589) 2389,1589 2395,1595 ; 1.0M.1 2395,1595 ; --.2 2446,1368 2398,1416 2398,1592 2395,1595
NetCD4001_3: CD4001.3 UVW_OUT_4018.1
NetCD4001_4: CD4001.4 UVW_OUT_4018.2
NetCD4001_11: CD4001.11 UVW_OUT_4018.3
NetI/O_4: I/O.4 STM8S003F3P6.17
NetI/O_5: I/O.5 STM8S003F3P6.16
NetI/O_6: I/O.6 STM8S003F3P6.15
NetMS33035_11: MS33035.11 SPEED.2 | length 363.7
  Top Layer w20: SPEED.2 2078,1683 2140,1621 MS33035.11
NRST: 4.7K.1 104--.2 debug.3 RST.2 STM8S003F3P6.4
OSC: 5.1K.1 103.1 MS33035.10 | length 192.8
  Top Layer w20: v1(2170,1671) MS33035.10
  Bottom Layer w20: 5.1K.1 2172,1674 103.1
OSCIN: 8M.2 20P_1.2 STM8S003F3P6.5
OSCOUT: 8M.1 20P_2.2 STM8S003F3P6.6
PWM: DRV11873.16 PWM_FROM.2
Q1: CD4013.1 CD4053.13
Q1-: CD4013.2 CD4053.12
Q2: CD4013.13 CD4053.1
Q2-: CD4013.12 CD4053.2
Q3: CD4013_.1 CD4053.3
Q3-: CD4013_.2 CD4053.5
Q11: CD4018.5 CD4070.2
Q33: CD4018.6 CD4070.6
Q55: CD4001.13 CD4018.13
Q111: CD4001.1 CD4070.3
Q333: CD4001.5 CD4070.4
RD: 1K_1.2 10K_2.2 DRV11873.3
REF_OUT: 5.1K.2 47UF.1 MS33035.8 REF_OUT.1 RESET.2 SPEED.1 | length 1932.4
  Top Layer w20: REF_OUT.1 1932,1871 SPEED.1 2032,1771 MS33035.8 2357,1771 2395,1733 2395,1569 v1(2348,1522)
  Bottom Layer w20: v1(2348,1522) 2348,1365 2430,1283 2970,1283 v1(3084,1169) 3124,1209 47UF.1
  other v1: 2171,1770
RX: STM8S003F3P6.3 UART.2
SA: "SA SB SC.1" MS33035.4 | length 656
  Top Layer w20: v1(2060,2049) 2060,2047 2136,1971 MS33035.4
  Bottom Layer w20: 1839,2378 1839,2268 2060,2047 v1(2060,2049)
SB: "SA SB SC.2" MS33035.5 | length 660
  Top Layer w20: v1(2109,1949) 2137,1921 MS33035.5
  Bottom Layer w20: 1939,2378 1939,2227 2109,2057 v1(2109,1949)
SC: "SA SB SC.3" MS33035.6 | length 646.9
  Top Layer w20: v1(2170,1875) 2174,1871 MS33035.6
  Bottom Layer w20: 2039,2378 2039,2192 2153,2078 2153,1892 v1(2170,1875)
SCL: I/O.9 IIC.3 STM8S003F3P6.12
SDA: I/O.10 IIC.4 STM8S003F3P6.11
SWIM: debug.2 I/O.3 STM8S003F3P6.18
TX: STM8S003F3P6.2 UART.3
U: 1K_3_.2 5824.2 CD4053.14 DRV11873.10 Motor.2 UVW_OUT_4017.1
V: 1K_4_.2 5824_1.2 CD4053.15 DRV11873.9 Motor.3 UVW_OUT_4017.2
V5: 1K_5__.2 2.2UF.2 10K.2 10K_1.1 10K_2.1 10k_3.2 555.4 555.8 DRV11873.12
VCC: 1K_2.2 104.1 104_2.2 1000UF.1 DRV_OPT.8 LM2940.1 POWER_SW.2
VCC_12V: 104,-.2 220UF,.1 7812.3 MS33035.18 | length 1511.3
  Top Layer w20: v1(1712,1642) 1827,1642 1992,1477 2393,1477 2478,1562 2478,1780 2519,1821 MS33035.18
  Bottom Layer w20: 7812.3 1657,1587 v1(1712,1642)
  other v1: 1727,1624 1692,1657
VCC_DRV: 1K_3.2 10uf.2 220UF.1 DRV11873.11 DRV_OPT.1
VCC_MC: 1.1K,,.1 1.1K,.1 1.1K.1 2.2K.1 104,.2 220UF,,.1 1000UF,.1 7812.1 MS33035.17 POWER_MC.2 | length 2881.1
  Top Layer w20: v1@1789,2077 v1(1794,2082) 1944,2232 v1(2122,2232) 2266,2232 v1(2299,2199) v1(2505,2199) ; 2700,1771 2735,1771 2866,1640 2.2K.1
  Top Layer w30: v1(1191,2073) 1191,1684 7812.1 ; MS33035.17 2700,1771 2763,1834 2763,1935 v1(2748,1950)
  Bottom Layer w30: v1(1191,2073) POWER_MC.2 ; v1(2505,2199) 2542,2162 2542,2156 v1(2748,1950)
  Bottom Layer w50: POWER_MC.2 1775,2073 v1(1806,2104)
  other v1: 1193,2033 1778,2060
VCP: 104.2 DRV11873.4
W: 1K_5_.2 5824_2.2 CD4053.4 DRV11873.7 Motor.4 UVW_OUT_4017.3 | length 376.7
  Top Layer w15: v1(2507.2,3676.82) DRV11873.7
  Bottom Layer w15: v1(2222,3621) 2248,3595 2400,3595 2476,3671 2501.38,3671 v1(2507.2,3676.82)
传5V: 22u_0.1 100uf.1 104_3.2 105.1 1117-3.3.3 DIG_POWER.3 DRV_OPT.4 LM2940.3 | length 1728.8
  Top Layer w15: v1(3331,4123) 3375,4079 3456,4079 v1(3620,3915)
  Bottom Layer w15: 104_3.2 3140,4322 100uf.1 ; v1(3330,4464) 100uf.1 ; v1(3331,4123) 3331,4321 100uf.1 ; v1(3620,3915) 3620,3866.4 22u_0.1 3719.4,3857.4 105.1 3956,3870 4121.45,3704.55 1117-3.3.3
pads on no net: 1117-3.3.4 CD4001.8 CD4001.9 CD4001.10 CD4013_.8 CD4013_.9 CD4013_.10 CD4013_.11 CD4013_.12 CD4013_.13 CD4018.3 CD4018.4 CD4018.9 CD4018.11 CD4018.12 CD4070.8 CD4070.9 CD4070.10 CD4070.11 CD4070.12 CD4070.13 DIG_POWER.1 LM358.5 LM358.6 LM358.7 LM2940.4 POWER_SW.1

## Polygon pours and split planes (outlines as drawn)
GND_MC on Top Layer "Top Layer-No Net" (solid, remove dead copper, pour order 4): 968,2575 3639,2575 3639,944 3639,942 963,942 950,942 950,2578
GND_MC on Bottom Layer "Top Layer-No Net" (solid, remove dead copper, pour order 3): 968,2575 3639,2575 3639,944 3639,942 963,942 950,942 950,2578

## Keep-outs
Keep-Out Layer:
  the board outline again, w10

## Other copper
Top Layer:
  rectangle net Net,,,,,,_1: 3443,1520 3577,2335

## Silkscreen, mask and mechanical layers (free items; w line width, h text height)
Top Overlay:
  text "V R T G" at 4079,4780 h40
  text "ON" at 2174,4721 h40
  text "ON" at 3006,4714 h40
  text "KEY" at 4660,4658 h40
  text "V S R G" at 4072,4585 h40
  text "KEY" at 4660,4555 h40
  text "KEY" at 4660,4058 h40
  text "KEY" at 4660,3953 h40
  text "DRV_ON" at 3539,3920 h40
  text "DIR" at 3539,3810 h40
  text "555" at 2064,3740 h40
  text "MCU" at 2250,3739 h40
  text "LOW SPEED" at 3539,3706.67 h40
  text "SDA SCL G V33" at 4540,3698 h60 r90
  text "358_ON" at 3535,3616 h40
  text "+" at 4825,3572 h60
  text "W V U COM" at 2641,3539 h40
  text "MOS_GND" at 3395,2477 h40
  text "COM_GND" at 3096,2474 h40
  text "14V-24V" at 1012,2129 h40
  text "+++" at 1075,2034 h80
  text "10K_ADJ" at 1866,1467 h40
  text "EN-60/120-DIR-BREAK" at 1835,1154 h40
  text "GND" at 2486,1051 h40
Bottom Overlay:
  text "PD3 TIM2_CH2 ADC" at 4765,4651 h40
  text "PD2 TIM2_CH3" at 4757,4560 h40
  text "PD1" at 4763,4460 h40
  text "PC7 MISO" at 4768,4361 h40
  text "PC6 MOSI" at 4768,4256 h40
  text "PC5 SPI_SCL" at 4768,4156 h40
  text "PC4 TIM1_CH4" at 4766,4062 h40
  text "PC3 TIM1_CH3" at 4766,3958 h40
  text "PB4 SCL" at 4773,3859 h40
  text "PB5 SDA" at 4773,3762 h40
Top Solder:
  rectangle: 3443,1520 3577,2335